# Altium PCB SCH_onelayer.PcbDoc
Units mm, origin at the board's own origin, x right, y up, seen from the top; angles counter-clockwise.
Board outline 100.25 x 120.41 mm, 2 copper layers (Top Layer, Bottom Layer); 43 components, 41 nets, 147 pads, 0 vias.
Unrouted connection lines stored in the file: 57.
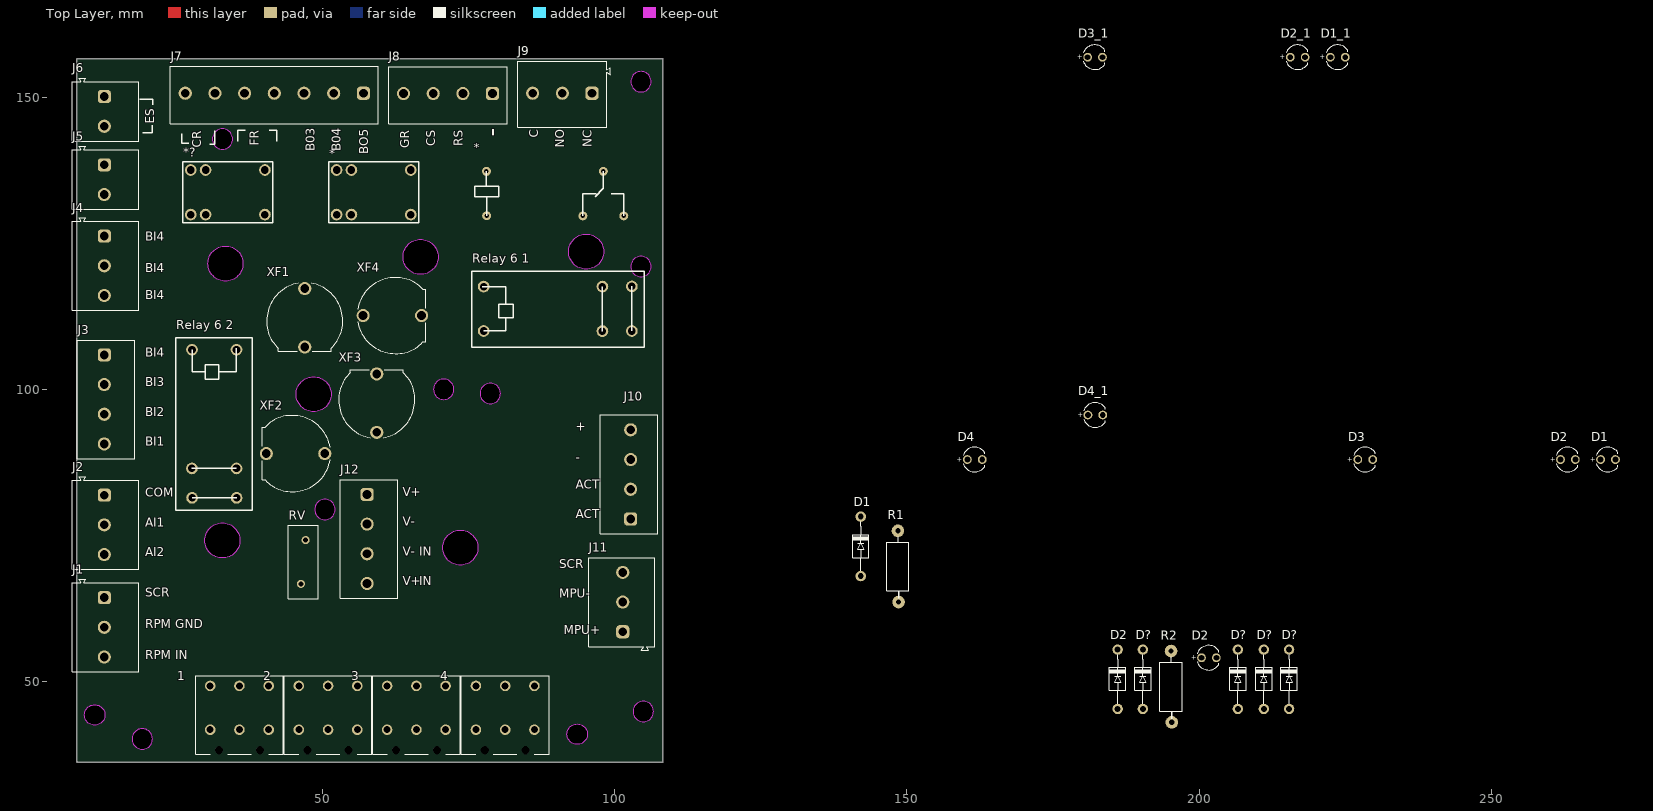
[diagram p0: Top Layer view]
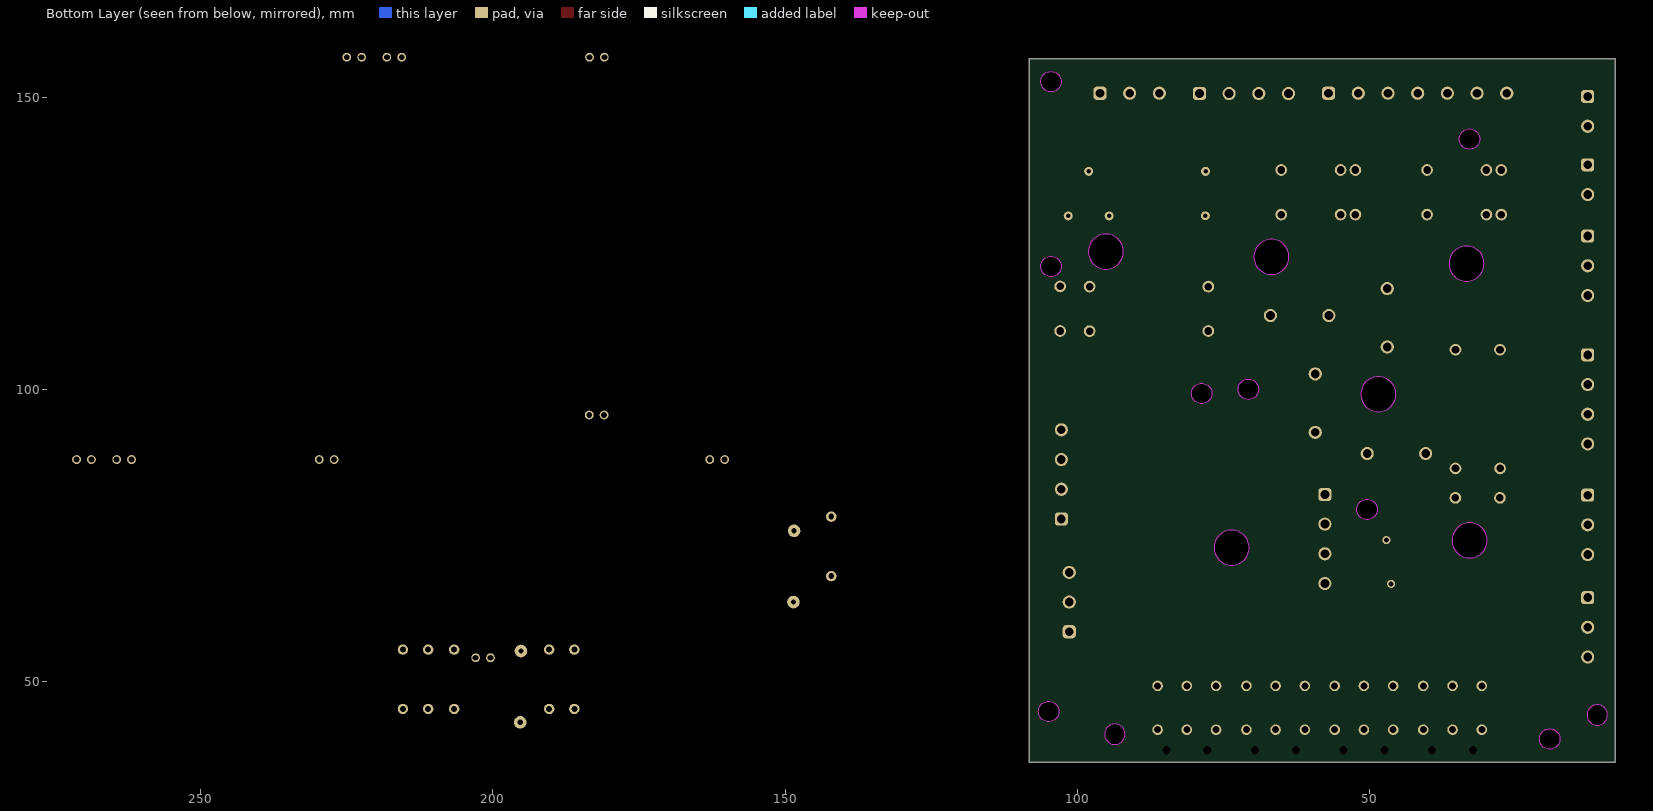
[diagram p1: Bottom Layer view, seen from below]

## Layer stack, top to bottom
Top Solder: solder mask 0.0102, Solder Resist, Dk 3.5
Top Layer: signal copper 0.0356
Dielectric 1: dielectric 0.32, FR-4, Dk 4.8
Bottom Layer: signal copper 0.0356
Bottom Solder: solder mask 0.0102, Solder Resist, Dk 3.5

## Board outline
8.027,36.399 cw(c8.128,36.477) 8.001,36.477 8.001,156.477 cw(c8.128,156.477) 8.128,156.604 108.128,156.604 cw(c108.128,156.477) 108.255,156.477 cw(c108.128,156.477) 108.229,156.399 cw(c108.128,156.322) 108.255,156.322 108.255,36.322 cw(c108.128,36.322) 108.128,36.195 8.128,36.195 cw(c8.128,36.322)
cut-out: 32.893,71.168 cw(c32.893,74.168) 29.893,74.168 cw(c32.893,74.168) 32.893,77.168 cw(c32.893,74.168) 35.893,74.168 cw(c32.893,74.168)
cut-out: 102.771,121.031 ccw(c104.521,121.031) 104.521,119.281 ccw(c104.521,121.031) 106.271,121.031 ccw(c104.521,121.031) 104.521,122.781 ccw(c104.521,121.031)
cut-out: 95.123,120.571 cw(c95.123,123.571) 92.123,123.571 cw(c95.123,123.571) 95.123,126.571 cw(c95.123,123.571) 98.123,123.571 cw(c95.123,123.571)
cut-out: 33.423,118.534 cw(c33.423,121.534) 30.423,121.534 cw(c33.423,121.534) 33.423,124.534 cw(c33.423,121.534) 36.423,121.534 cw(c33.423,121.534)
cut-out: 48.514,96.187 cw(c48.514,99.187) 45.514,99.187 cw(c48.514,99.187) 48.514,102.187 cw(c48.514,99.187) 51.514,99.187 cw(c48.514,99.187)
cut-out: 66.802,119.682 cw(c66.802,122.682) 63.802,122.682 cw(c66.802,122.682) 66.802,125.682 cw(c66.802,122.682) 69.802,122.682 cw(c66.802,122.682)
cut-out: 11.049,42.573 cw(c11.049,44.323) 9.299,44.323 cw(c11.049,44.323) 11.049,46.073 cw(c11.049,44.323) 12.799,44.323 cw(c11.049,44.323)
cut-out: 91.849,41.021 cw(c93.599,41.021) 93.599,42.771 cw(c93.599,41.021) 95.349,41.021 cw(c93.599,41.021) 93.599,39.271 cw(c93.599,41.021)
cut-out: 17.442,40.213 ccw(c19.192,40.213) 19.192,38.463 ccw(c19.192,40.213) 20.942,40.213 ccw(c19.192,40.213) 19.192,41.963 ccw(c19.192,40.213)
cut-out: 48.684,79.456 ccw(c50.434,79.456) 50.434,77.706 ccw(c50.434,79.456) 52.184,79.456 ccw(c50.434,79.456) 50.434,81.206 ccw(c50.434,79.456)
cut-out: 76.99,99.314 ccw(c78.74,99.314) 78.74,97.564 ccw(c78.74,99.314) 80.49,99.314 ccw(c78.74,99.314) 78.74,101.064 ccw(c78.74,99.314)
cut-out: 31.158,142.829 ccw(c32.908,142.829) 32.908,141.079 ccw(c32.908,142.829) 34.658,142.829 ccw(c32.908,142.829) 32.908,144.579 ccw(c32.908,142.829)
cut-out: 102.771,152.654 ccw(c104.521,152.654) 104.521,150.904 ccw(c104.521,152.654) 106.271,152.654 ccw(c104.521,152.654) 104.521,154.404 ccw(c104.521,152.654)
cut-out: 69.004,100.03 ccw(c70.754,100.03) 70.754,98.28 ccw(c70.754,100.03) 72.504,100.03 ccw(c70.754,100.03) 70.754,101.78 ccw(c70.754,100.03)
cut-out: 103.167,44.912 ccw(c104.917,44.912) 104.917,43.162 ccw(c104.917,44.912) 106.667,44.912 ccw(c104.917,44.912) 104.917,46.662 ccw(c104.917,44.912)
cut-out: 73.612,69.931 cw(c73.612,72.931) 70.612,72.931 cw(c73.612,72.931) 73.612,75.931 cw(c73.612,72.931) 76.612,72.931 cw(c73.612,72.931)

## Design rules (kind name [scope] priority, off if disabled: settings)
Clearance [All] p1: gap=0.254 ignorepadtopadclearanceinfootprint=FALSE except(0: Arc-Hole Track-Hole SMDPad-Hole THPad-Hole Via-Hole Fill-Hole Poly-Hole Region-Hole Text-Hole)
PolygonConnect [All] p1: connectstyle=Relief reliefconductorwidth=0.254 reliefentries=4 polygonreliefangle="90 Angle" airgapwidth=0.254
RoutingVias [All] p1: holewidth=0.711 width=1.27 viastyle="Through Hole" minholewidth=0.711 minwidth=1.27 maxholewidth=0.711 maxwidth=1.27
SolderMaskExpansion [All] p1: expansion=0.102 istentingtop=FALSE
Width [All] p1: maxlimit=0.254 minlimit=0.254 preferedwidth=0.254
30 further rules are at their usual default settings.

## Classes and differential pairs
component class SCH_onelayer: 1 2 3 4 * *? D1 D2 D3 D4 D? J1 J2 J3 J4 J5 J6 J7 J8 J9 J10 J11 J12 R1 R2 "Relay 6 1" "Relay 6 2" RV XF1 XF2 XF3 XF4

## Components (designator, comment, footprint, x,y, rotation, side; value= is the part's Value field where it differs from the comment)
1 "Domino AML-6-1853531" AML-6-1853531 35.894,37.214 r90 top
2 "Domino AML-6-1853531" AML-6-1853531 51.054,37.214 r90 top
3 "Domino AML-6-1853531" AML-6-1853531 66.167,37.214 r90 top
4 "Domino AML-6-1853531" AML-6-1853531 81.36,37.214 r90 top
* "relay 6 pin" "relay 6 pin" 60.01,132.991 r0 top
* "Relay G2RL-1-24VDC" G2RL-1-24VDC 90.297,132.992 r0 top
*? "relay 6 pin" "relay 6 pin" 35.052,132.991 r0 top
D1 "Diode" DIO-1A 142.113,68.072 r90 top value=1N5007
D1 "Super Red, 2V, 40deg" WL-TMRC_3mm 269.954,88.011 r0 top
D1_1 "Super Red, 2V, 40deg" WL-TMRC_3mm 223.726,156.845 r0 top (schematic designator D1)
D2 "Diode" DIO-1A 186.055,45.339 r90 top value=1N5007
D2 "Super Red, 2V, 40deg" WL-TMRC_3mm 201.676,54.102 r0 top
D2 "Super Red, 2V, 40deg" WL-TMRC_3mm 263.096,88.011 r0 top
D2_1 "Super Red, 2V, 40deg" WL-TMRC_3mm 216.868,156.845 r0 top (schematic designator D2)
D3 "Super Red, 2V, 40deg" WL-TMRC_3mm 228.425,88.011 r0 top
D3_1 "Super Red, 2V, 40deg" WL-TMRC_3mm 182.197,156.845 r0 top (schematic designator D3)
D4 "Super Red, 2V, 40deg" WL-TMRC_3mm 161.623,88.011 r0 top
D4_1 "Super Red, 2V, 40deg" WL-TMRC_3mm 182.245,95.631 r0 top (schematic designator D4)
D? "Diode" DIO-1A 211.074,45.339 r90 top value=1N5007
D? "Diode" DIO-1A 190.373,45.339 r90 top value=1N5007
D? "Diode" DIO-1A 206.629,45.339 r90 top value=1N5007
D? "Diode" DIO-1A 215.392,45.339 r90 top value=1N5007
J1 "691236510003" 691236510003 12.875,59.309 r270 top
J2 "691236510003" 691236510003 12.875,76.835 r270 top
J3 "691242510004" 691242510004 13,98.298 r270 top
J4 "691236510003" 691236510003 12.875,121.158 r270 top
J5 "691236510002" 691236510002 12.875,135.89 r270 top
J6 "691236510002" 691236510002 12.875,147.574 r270 top
J7 "691242510007" 691242510007 41.783,150.381 r180 top
J8 "691242510004" 691242510004 71.501,150.322 r180 top
J9 "691236510003" 691236510003 91.059,150.506 r180 top
J10 "691242510004" 691242510004 102.443,85.471 r90 top
J11 "691236510003" 691236510003 101.219,63.627 r90 top
J12 "691242510004" 691242510004 57.958,74.422 r270 top
R1 "Res" RES-1/2W 148.463,69.215 r90 top
R2 "Res" RES-1/2W 195.199,48.641 r90 top
"Relay 6 1" "" "Relay 6 pin SMIH-SL-A" 97.409,115.316 r180 top
"Relay 6 2" "" "Relay 6 pin SMIH-SL-A" 33.02,86.995 r90 top
RV "820512001" D12.5xW5.1xH15.5xP0.8 46.736,70.485 r270 top
XF1 "696309001002" 696309001002 46.99,112.266 r90 top
XF2 "696309001002" 696309001002 45.419,89.027 r0 top
XF3 "696309001002" 696309001002 59.309,97.663 r270 top
XF4 "696309001002" 696309001002 61.976,112.649 r180 top

## Footprints (in the part's own frame and the unit in brackets; to place one, negate y for a bottom-side part, rotate by r counter-clockwise, add the part's x,y. Pads: shape width x height; smd on the part's side, far side on the other; paste and mask are expansions set on the pad)
691236510002 [mm] "Horizontal Cable Entry with Rising Cage Clamp, pitch 5.08mm, 02p"
  rrect50% 2.25x2.25 hole 1.5: 1(-2.54,-0.175)
  round 2.25 hole 1.5: 2(2.54,-0.175)
  silkscreen extent -5.68,-5.68 5.08,5.68, body extent -5.68,-5.67 5.08,5.68, height 18.1
691236510003 [mm] "Horizontal Cable Entry with Rising Cage Clamp, pitch 5.08mm, 03p"
  rrect50% 2.25x2.25 hole 1.5: 1(-5.08,-0.175)
  round 2.25 hole 1.5: 2(0,-0.175) 3(5.08,-0.175)
  silkscreen extent -8.22,-5.68 7.62,5.68, body extent -8.22,-5.68 7.62,5.68, height 18.1
691242510004 [mm] "Serie 2425 - 5.08 mm _ 4 pins"
  rrect50% 2.25x2.25 hole 1.5: 1(-7.62,-0.3)
  round 2.25 hole 1.5: 2(-2.54,-0.3) 3(2.54,-0.3) 4(7.62,-0.3)
  silkscreen extent -10.16,-4.9 10.16,4.9, body extent -10.16,-4.9 10.16,4.9, height 13.85
691242510007 [mm] "Serie 2425 - 5.08 mm _ 7 pins"
  rrect50% 2.25x2.25 hole 1.5: 1(-15.24,-0.3)
  round 2.25 hole 1.5: 2(-10.16,-0.3) 3(-5.08,-0.3) 4(0,-0.3) 5(5.08,-0.3) 6(10.16,-0.3) 7(15.24,-0.3)
  silkscreen extent -17.78,-4.9 17.78,4.9, body extent -17.78,-4.9 17.78,4.9, height 13.85
696309001002 [mm] "SHOCKSAFE FUSEHOLDERS - PCB - TURN’N LOCK COVER - THT"
  round 2.25 hole 1.5: 1(-5,0) 2(5,0)
  silkscreen extent -5.7,-6.5 5.91,6.51, body extent -5.7,-6.5 6,6.5, height 33.37
AML-6-1853531 [mm]
  round 1.8 hole 1.2: 1(4.572,5.08) 2(12.072,5.08) 3(4.572,0.08) 4(12.072,0.08) 5(4.572,-4.92) 6(12.072,-4.92)
  round 1.2 hole 1.4 unplated: MH1(1.072,3.58) MH2(1.072,-3.42)
  silkscreen extent 0.37,-7.42 13.77,7.58, body extent -14.88,-7.38 13.72,9.42, height 23.5
D12.5xW5.1xH15.5xP0.8 [mm] "Disk Varistor, Diameter 12.5mm, Width 5.1mm"
  round 1.4 hole 0.9: 1(-3.75,0.4) 2(3.75,-0.4)
  silkscreen extent -6.25,-2.55 6.25,2.55, body extent -5.5,-1.87 5.5,1.88, height 13.3
DIO-1A [mil]
  round 70 hole 40: 1(0,0) 2(400,0)
  silkscreen extent 35,-55 365,55, body extent -11,-50 411,54, height 102
G2RL-1-24VDC [mil]
  round 60 hole 30: 1(-480,-128.82) 2(168.43,-130) 3(444.02,-130) 4(306.22,170) 5(-481.18,170)
  silkscreen extent -560,-130 444,170, body extent -567,-216 567,276, height 618
"relay 6 pin" [mm]
  round 2 hole 1.3 paste+0 mask+0.051: 1(5.126,4.55) 2(-5.034,4.55) 3(-7.574,4.55) 4(-7.574,-3.07) 5(-5.034,-3.07) 6(5.126,-3.07)
  silkscreen extent -8.94,-4.44 6.48,5.97, body extent -9.07,-4.54 6.53,6.06, height 11.7
"Relay 6 pin SMIH-SL-A" [mm]
  round 2 hole 1.3 paste+0 mask+0.051: 12(-0.508,5.334) 12(-0.508,-2.286) 14(-5.542,5.312) 14(-5.542,-2.308) A1(19.812,5.314) A2(19.812,-2.286)
  silkscreen extent -7.67,-4.95 21.88,8.13
RES-1/2W [mil]
  round 85 hole 35: 1(-220,-5) 2(260,0)
  silkscreen extent -195,-74 221,75, body extent -230,-60 270,56, height 121
WL-TMRC_3mm [mm] "THT Mono-color Round Color LED, 2-leads"
  round 1.5 hole 1: 1(-1.27,0) 2(1.27,0)
  silkscreen extent -2,-2.1 1.69,2.1, body extent -1.99,-1.97 1.63,1.97, height 5.35

## Part data
D1 D2 D? D? D? D?: "Default Diode", Code - JEDEC=DO-214-AB, Published=8-Jun-2000, Publisher="Altium Limited", Revision="July-2002: Re-released for DXP Platform."
D1 D1_1 D2 D2 D2_1 D3 D3_1 D4 D4_1: library part 151031SS04000, "WL-TMRC THT Mono-color Round Color, size 3mm, Super Red, 2V, 40deg", Emitting Color="Super Red", Forward Voltage=2V, Operating Temperature="-40 to +85degC", Chip Technology=AlInGaP, ComponentLink1Description=Manufacturer, ComponentLink1URL=http://www.we-online.de, ComponentLink2Description=Datasheet, ComponentLink2URL=https://katalog.we-online.de/led/datasheet/151031SS04000.pdf, Dominant Wavelength=635nm, Luminous Intensity=160mcd, Mounting Technology=THT, Packaging=Bulk, Part Number=151031SS04000, Peak Wavelength=640nm, Published Date="January 2021", Publisher="Wurth Elektronik", Size=3mm, Viewing Angle=40deg
J1 J2 J4 J9 J11: "WR-TBL Serie 2365 Horizontal Entry, Rising Cage Clamp, THT, pitch 5.08mm, 3p", Manufacturer="Wurth Elektronik", Operating Temperature="-30 to +120degC", Rated Current [UL]=20A, Working Voltage [UL]=300VAC, Application="Rising Cage Clamp", ComponentLink1Description=Manufacturer, ComponentLink1URL=http://www.we-online.de, ComponentLink2Description=Datasheet, ComponentLink2URL=https://katalog.we-online.de/em/datasheet/691236510003.pdf, Manufacturer Part Number=691236510003, Modularity=Yes, Mounting Technology=THT, Packaging=Box, PCB/Cable/Panel=PCB, Pin Number=3, Pitch=5.08mm, Published Date="Feburary 2021", Type=Horizontal
J3 J8 J10 J12: "WR-TBL Serie 2425 Horizontal Entry Modular, Rising Cage Clamp, THT, pitch 5.08mm, 4p", Manufacturer="Wurth Elektronik", Operating Temperature="-30 to +120degC", Rated Current [UL]=14A, Working Voltage [UL]=300VAC, Application="Rising Cage Clamp", ComponentLink1Description=Manufacturer, ComponentLink1URL=http://www.we-online.de, ComponentLink2Description=Datasheet, ComponentLink2URL=https://katalog.we-online.de/em/datasheet/691242510004.pdf, Manufacturer Part Number=691242510004, Modularity=No, Mounting Technology=THT, Packaging=Box, PCB/Cable/Panel=PCB, Pin Number=4, Pitch=5.08mm, Published Date="Feburary 2021", Type=Horizontal
J5 J6: "WR-TBL Serie 2365 Horizontal Entry, Rising Cage Clamp, THT, pitch 5.08mm, 2p", Manufacturer="Wurth Elektronik", Operating Temperature="-30 to +120degC", Rated Current [UL]=20A, Working Voltage [UL]=300VAC, Application="Rising Cage Clamp", ComponentLink1Description=Manufacturer, ComponentLink1URL=http://www.we-online.de, ComponentLink2Description=Datasheet, ComponentLink2URL=https://katalog.we-online.de/em/datasheet/691236510002.pdf, Manufacturer Part Number=691236510002, Modularity=Yes, Mounting Technology=THT, Packaging=Box, PCB/Cable/Panel=PCB, Pin Number=2, Pitch=5.08mm, Published Date="Feburary 2021", Type=Horizontal
J7: "WR-TBL Serie 2425 Horizontal Entry Modular, Rising Cage Clamp, THT, pitch 5.08mm, 7p", Manufacturer="Wurth Elektronik", Operating Temperature="-30 to +120degC", Rated Current [UL]=14A, Working Voltage [UL]=300VAC, Application="Rising Cage Clamp", ComponentLink1Description=Manufacturer, ComponentLink1URL=http://www.we-online.de, ComponentLink2Description=Datasheet, ComponentLink2URL=https://katalog.we-online.de/em/datasheet/691242510007.pdf, Manufacturer Part Number=691242510007, Modularity=No, Mounting Technology=THT, Packaging=Box, PCB/Cable/Panel=PCB, Pin Number=7, Pitch=5.08mm, Published Date="Feburary 2021", Type=Horizontal
R1 R2: Manufacturer="Generic Components", Class=Passive, Published=08/06/2000, Publisher="Altium Hobart Technology Centre", SubClass=R
"Relay 6 1" "Relay 6 2": library part "Relay DMIH-05/12/24VDC-SL-A songle 16A 6pin"
RV: "WE-VD Disk Varistor, D12.5mm, W5.1mm, H15.5mm, 20VAC, 26VDC", (Channel) Input Capacitance=4250pF, (Reverse) Breakdown Voltage=33V, (Reverse) Peak Pulse Current=500A, AC Operating Voltage=20V, Clamping Voltage=65V, DC Operating Voltage=26V, Manufacturer="Wurth Elektronik", Operating Temperature="-40 to +85degC", Power Dissipation=0.05W, ComponentLink1Description=Manufacturer, ComponentLink1URL=http://www.we-online.de, ComponentLink2Description=Datasheet, ComponentLink2URL=https://www.we-online.com/catalog/datasheet/820512001.pdf, Diameter=12.5mm, Energy Absorbtion=4.4J, Height max.=15.5mm, Manufacturer Part Number=820512001, Mounting Technology=THT, Packaging="Tape and Reel", Published Date="April 2020", Width max.=5.1mm, Width typ.=3.3mm
XF1 XF2 XF3 XF4: "WR-FSH Shocksafe Fuse Holder Turn and Lock Cover for PCB", Manufacturer="Wurth Elektronik", Operating Temperature="-30 to +120degC", ComponentLink1Description=Manufacturer, ComponentLink1URL=http://www.we-online.de, ComponentLink2Description=Datasheet, ComponentLink2URL=https://www.we-online.com/catalog/datasheet/696309001002.pdf, Fuse Size=5x20mm, Manufacturer Part Number=696309001002, Mounting Technology=THT, Packaging=Box, Published Date="March 2021"

## Nets (pads, with @x,y where several pads share a name; then routed paths per layer and width w, separated by ;. In a path a pad name is that pad's centre, name@x,y a point inside that pad or via, vN(x,y) a via of type N, cw(c..) or ccw(c..) an arc to the next point about the centre after c; other vN are vias at no path point)
+: "Relay 6 2.12" D1.1@268.684,88.011 D1.2@142.113,78.232 D2.2@186.055,55.499 J4.3 J5.2 R2.1 XF1.2
"+V IN": 3.2 J12.4
-: 2.5 3.1 J4.1 J6.2 J7.5 J7.7 J8.1 J12.2 RV.2
"-V IN": 2.6 J12.3
ACT: 4.4 J10.2
"ACT 1": 4.6 J10.1
AI1: 1.5 J2.2
AI2: 1.4 J2.3
B03: J7.3
B04: J7.2
B05: D1.1@142.113,68.072 J5.1 J7.1 R1.1
BI1: 2.3 J3.4
BI2: 2.2 J3.3
BI3: J3.2
BI4: J3.1
COM: 1.6 2.1 *.4@98.075,137.31 J2.1 J9.3
"COM RL1": 2.4
"COM RL2": 
"COM RL3": "Relay 6 1.12"
CR: 1.2 J1.1
CS: J8.3
D+: 3.3 J4.2
F3: 3.4 XF3.1
F4: 3.6 XF4.1
GR: J8.4
J62: J6.1
J71: "Relay 6 1.A1" D2.1@186.055,45.339 D2.2@202.946,54.102 J7.6
MPU+: 4.5 J11.1
MPU-: 4.3 J11.2
NC: *.2@94.575,129.69 J9.1
NetD1_2: D1.2@271.224,88.011 R1.2
NetD2_1: D2.1@200.406,54.102 R2.2
"NetRelay 6 2_14": "Relay 6 2.14" XF4.2
NO: *.3@101.575,129.69 J9.2
"PM GND": 1.3 J1.2
"PM IN": 1.1 J1.3
"RL4 +": J10.4
"RL -": 4.2 J10.3
Rs: J8.2
SCR: 4.1 J11.3
V+: "Relay 6 1.14" J12.1 RV.1 XF1.1 XF2.1 XF3.2
pads on no net: 1.MH1 1.MH2 2.MH1 2.MH2 3.5 3.MH1 3.MH2 4.MH1 4.MH2 "Relay 6 1.A2" "Relay 6 2.A1" "Relay 6 2.A2" *.1 *.2@54.976,137.541 *.3@52.436,137.541 *.4@52.436,129.921 *.5 *.6 *?.1 *?.2 *?.3 *?.4 *?.5 *?.6 D1_1.1 D1_1.2 D2.1@261.826,88.011 D2.2@264.366,88.011 D2_1.1 D2_1.2 D3.1 D3.2 D3_1.1 D3_1.2 D4.1 D4.2 D4_1.1 D4_1.2 D?.1 D?.2 J7.4 XF2.2

## Silkscreen, mask and mechanical layers (free items; w line width, h text height)
Top Overlay:
  lines w0.254: 18.737,149.611 21.023,149.611 21.023,148.722 ; 19.245,143.896 20.896,143.896 20.896,145.166 ; 25.908,143.764 25.908,142.113 27.178,142.113 ; 30.734,141.986 31.623,141.986 31.623,144.272 ; 35.56,142.464 35.56,144.369 36.83,144.369 ; 40.894,144.369 42.164,144.369 42.164,142.464
  text "ES" at 21.757,145.42 h2.54 r90
  text "-" at 81.369,143.259 h5.08 r90
  text "C" at 87.475,143.058 h2.54 r90
  text "FR" at 39.624,141.686 h2.54 r90
  text "RS" at 74.521,141.639 h2.54 r90
  text "CS" at 69.822,141.573 h2.54 r90
  text "NC" at 96.619,141.479 h2.54 r90
  text "NO" at 91.92,141.364 h2.54 r90
  text "CR" at 29.817,141.362 h2.54 r90
  text "GR" at 65.377,141.242 h2.54 r90
  text "B04" at 53.693,140.73 h2.54 r90
  text "B03" at 49.248,140.723 h2.54 r90
  text "BO5" at 58.392,140.208 h2.54 r90
  text "BI4" at 19.733,124.968 h2.54
  text "BI4" at 19.733,119.507 h2.54
  text "BI4" at 19.733,114.935 h2.54
  text "BI4" at 19.733,105.105 h2.54
  text "BI3" at 19.733,100.005 h2.54
  text "BI2" at 19.733,94.933 h2.54
  text "+" at 93.345,92.396 h2.54
  text "BI1" at 19.733,89.862 h2.54
  text "-" at 93.345,87.09 h2.54
  text "ACT" at 93.345,82.527 h2.54
  text "V+" at 63.756,81.229 h2.54
  text "COM" at 19.733,81.102 h2.54
  text "ACT" at 93.345,77.447 h2.54
  text "V-" at 63.756,76.149 h2.54
  text "AI1" at 19.733,76.02 h2.54
  text "V-" at 63.756,71.069 h2.54
  text "IN" at 66.596,71.069 h2.54
  text "AI2" at 19.733,70.939 h2.54
  text "SCR" at 90.551,68.938 h2.54
  text "V+" at 63.756,65.989 h2.54
  text "IN" at 66.596,65.989 h2.54
  text "SCR" at 19.733,63.985 h2.54
  text "MPU-" at 90.551,63.858 h2.54
  text "RPM GND" at 19.733,58.609 h2.54
  text "MPU+" at 91.313,57.635 h2.54
  text "RPM IN" at 19.733,53.289 h2.54
Mechanical 1:
  circle w0.254: c32.893,74.168 r3
  circle w0.254: c48.514,99.187 r3
  circle w0.254: c33.401,121.539 r3
  circle w0.254: c66.802,122.682 r3
  circle w0.254: c95.123,123.571 r3
  circle w0.254: c104.521,121.031 r1.75
  circle w0.254: c50.434,79.456 r1.75
  circle w0.254: c70.754,100.03 r1.75
  circle w0.254: c78.74,99.314 r1.75
  circle w0.254: c104.521,152.654 r1.75
  circle w0.254: c104.917,44.912 r1.75
  circle w0.254: c32.908,142.829 r1.75
  circle w0.254: c93.599,41.021 r1.75
  circle w0.254: c11.049,44.323 r1.75
  circle w0.254: c19.192,40.213 r1.75
  circle w0.254: c73.612,72.898 r3
  lines w0.254: 8.128,36.322 108.128,36.322 108.128,156.322 ; 8.128,36.477 8.128,156.477 108.128,156.477
  lines w1.2: 8.001,36.477 ccw(c8.128,36.477) 8.027,36.399 ccw(c8.128,36.322) 8.128,36.195 108.128,36.195 ccw(c108.128,36.322) 108.255,36.322 108.255,156.322 ccw(c108.128,156.322) 108.229,156.399 ccw(c108.128,156.477) 108.255,156.477 ccw(c108.128,156.477) 108.128,156.604 8.128,156.604 ccw(c8.128,156.477) 8.001,156.477 8.001,36.477

## Dimensions
108.128,36.322 to 108.128,156.604 on Top Overlay
8.001,36.477 to 108.255,36.322 on Top Overlay

## Text inside footprints (layer, text, board x,y; h text height)
D1: Top Overlay "+" at 266.904,87.661 h0.8
D1_1: Top Overlay "+" at 220.676,156.495 h0.8
D2: Top Overlay "+" at 198.626,53.752 h0.8
D2: Top Overlay "+" at 260.046,87.661 h0.8
D2_1: Top Overlay "+" at 213.818,156.495 h0.8
D3: Top Overlay "+" at 225.375,87.661 h0.8
D3_1: Top Overlay "+" at 179.147,156.495 h0.8
D4: Top Overlay "+" at 158.573,87.661 h0.8
D4_1: Top Overlay "+" at 179.195,95.281 h0.8